# EAGLE board Environment-ArduinoNano44-Mini-Enclosure-V10-Middles (EAGLE 7.4.0)
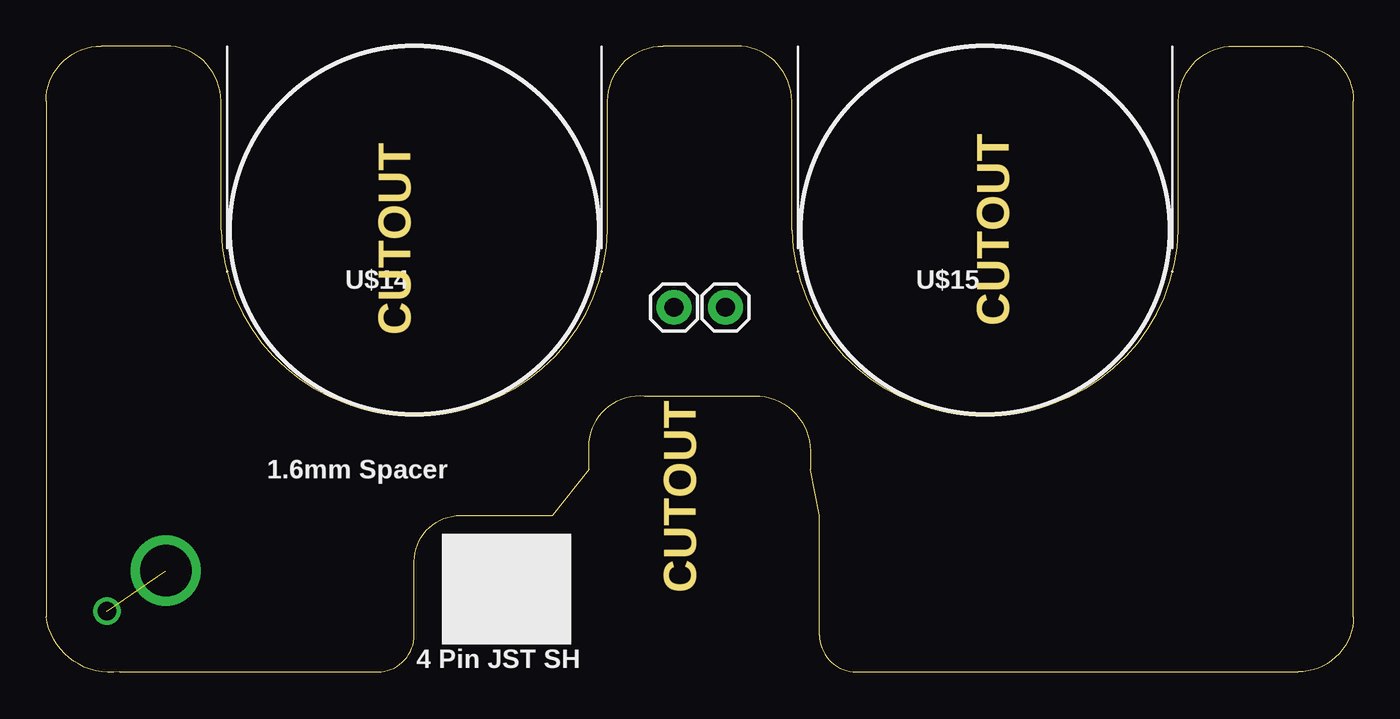
[diagram p0: board, top side]

Size 71 x 34.03 mm. Coordinates in mm from the lower left corner, seen from the top.
Outline: 0,31.03 0,3.03 arc90 4,0.03 18,0.03 arc90 20,2.03 20,6.03 arc-90 22.5,8.53 27.5,8.53 29.5,11.03 29.5,12.53 arc-90 32.5,15.03 38.5,15.03 arc-90 41.5,12.03 41.5,11.03 42,8.53 42,2.03 arc90 44,0.03 68,0.03 arc90 71,3.03 71,31.03 arc90 68,34.03 64.5,34.03 arc90 61.5,31.03 61.5,24.03 arc-90 51,14.03 arc-90 40.5,24.03 40.5,31.03 arc90 37.5,34.03 33.5,34.03 arc90 30.5,31.03 30.5,24.03 arc-90 20,14.03 arc-90 9.5,24.03 9.5,31.03 arc90 6.5,34.03 3,34.03 arc90 0,31.03
Copper layers (1*16): Top 0.035mm / dielectric 1.5mm / Bottom 0.035mm
Design rules "dirt_cheap_dirty_boards.v1.1": minimum track width 6mil, minimum drill 12mil, track to track 6mil, track to pad 6mil, pad to pad 6mil, via to via 6mil, smd to smd 0mil, copper to edge 10mil, drill to drill 10mil, minimum pad ring 10mil, minimum via ring 6mil, stop-mask expansion 2mil, vias tented up to drill 25mil, thermal gap 10mil
tKeepout: area 0,0 to 71,34
bKeepout: area 0,0 to 71,34
tRestrict: area 10,16 to 30,36; area 41,14 to 61,34; area 0,0 to 71,34
bRestrict: area 0,0 to 71,34

## Footprints (pad centres in the part's own frame; a part is rotated, then mirrored left to right if it is on the bottom)
1X01 = drill 1.016 pad 1.88: 1 0,0

## Placement (x,y rotation side)
J7  [1X01]  34.1,19.83 0 top
J8  [1X01]  36.9,19.83 0 top
U$14  CR2032-SPLIT-PCB-MIDDLE  [CR2032-SMD-MIDDLE-OUTLINE]  20,24.03 0 top
U$15  CR2032-SPLIT-PCB-MIDDLE  [CR2032-SMD-MIDDLE-OUTLINE]  51,24.03 0 top

## Library data of the parts
J7 J8 = SparkFun-Connectors
U$14 U$15 = ThingySticks

## Tracks (layer width: path | path; a pad name or v marks a point on that pad's centre or on a via)
3.3V  (via drill 1, 2.8)  (1 unrouted)
  other vias: 3.3,3.33 6.5,5.53

## Text on the board
Dimension: CUTOUT | CUTOUT | CUTOUT
tPlace: 4 Pin JST SH
tNames: 1.6mm Spacer
Document: Cable exit / From under PCB to / Front, then up to top | For Enclosure: / Hammon - 1551V2WH - / Plastic Enclosure, Small, ABS, 80 mm, 40 mm, 20 mm, IP30 / / Farnell: 2985869
Reference: Middle PCB | 1.6mm PCB
tDocu: NFC Pads